# Altium PCB zb_button.PcbDoc
Units mil, origin at the board's own origin, x right, y up, seen from the top; angles counter-clockwise.
Board outline 2500 x 2400 mil, 2 copper layers (Top Layer, Bottom Layer); 39 components, 27 nets, 120 pads, 2 vias.
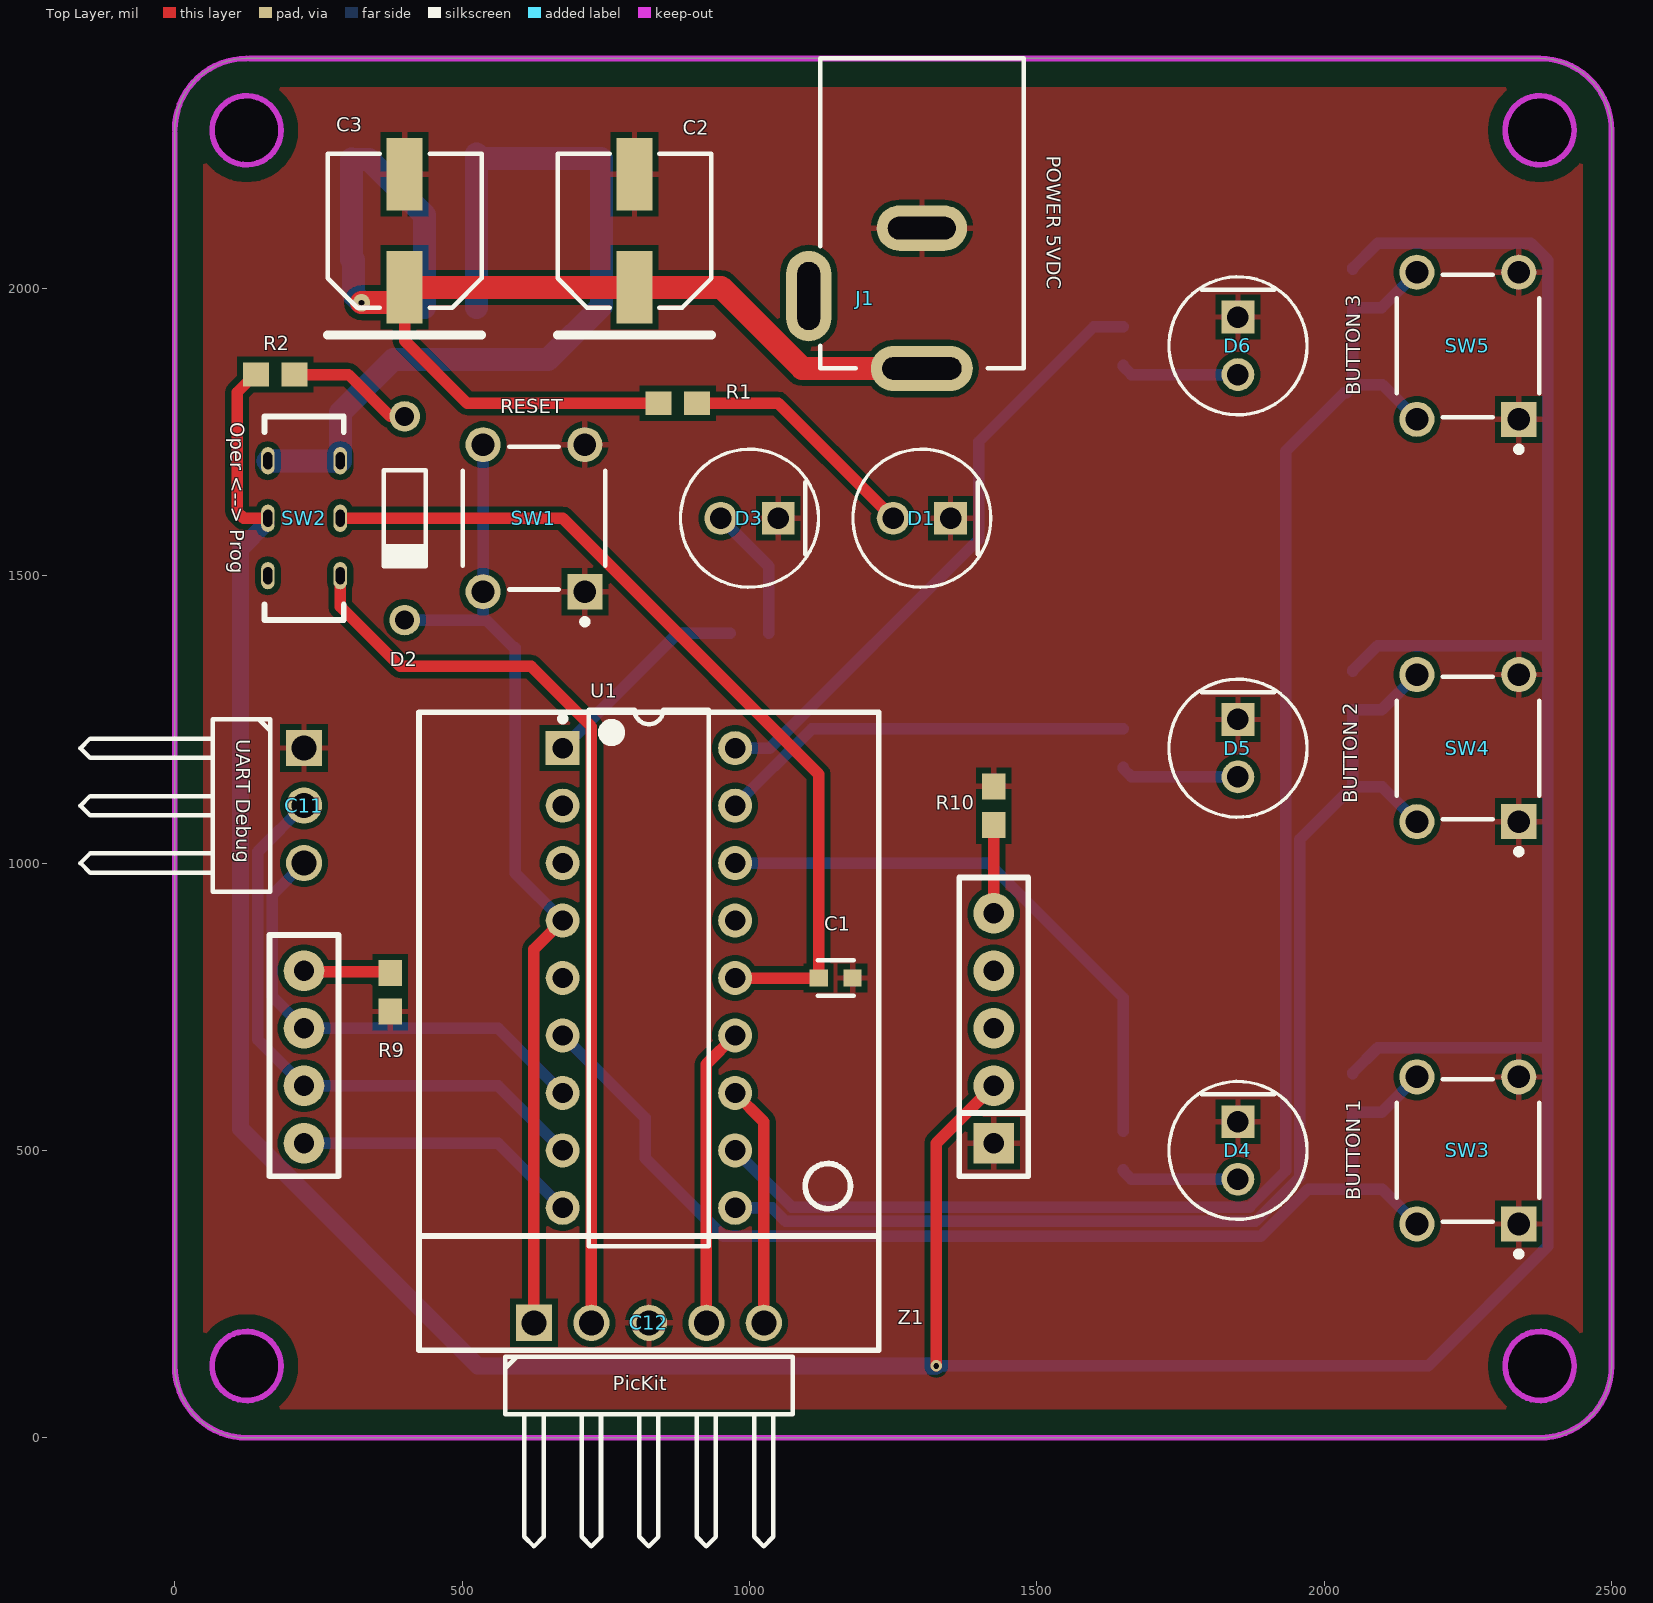
[diagram p0: Top Layer view]
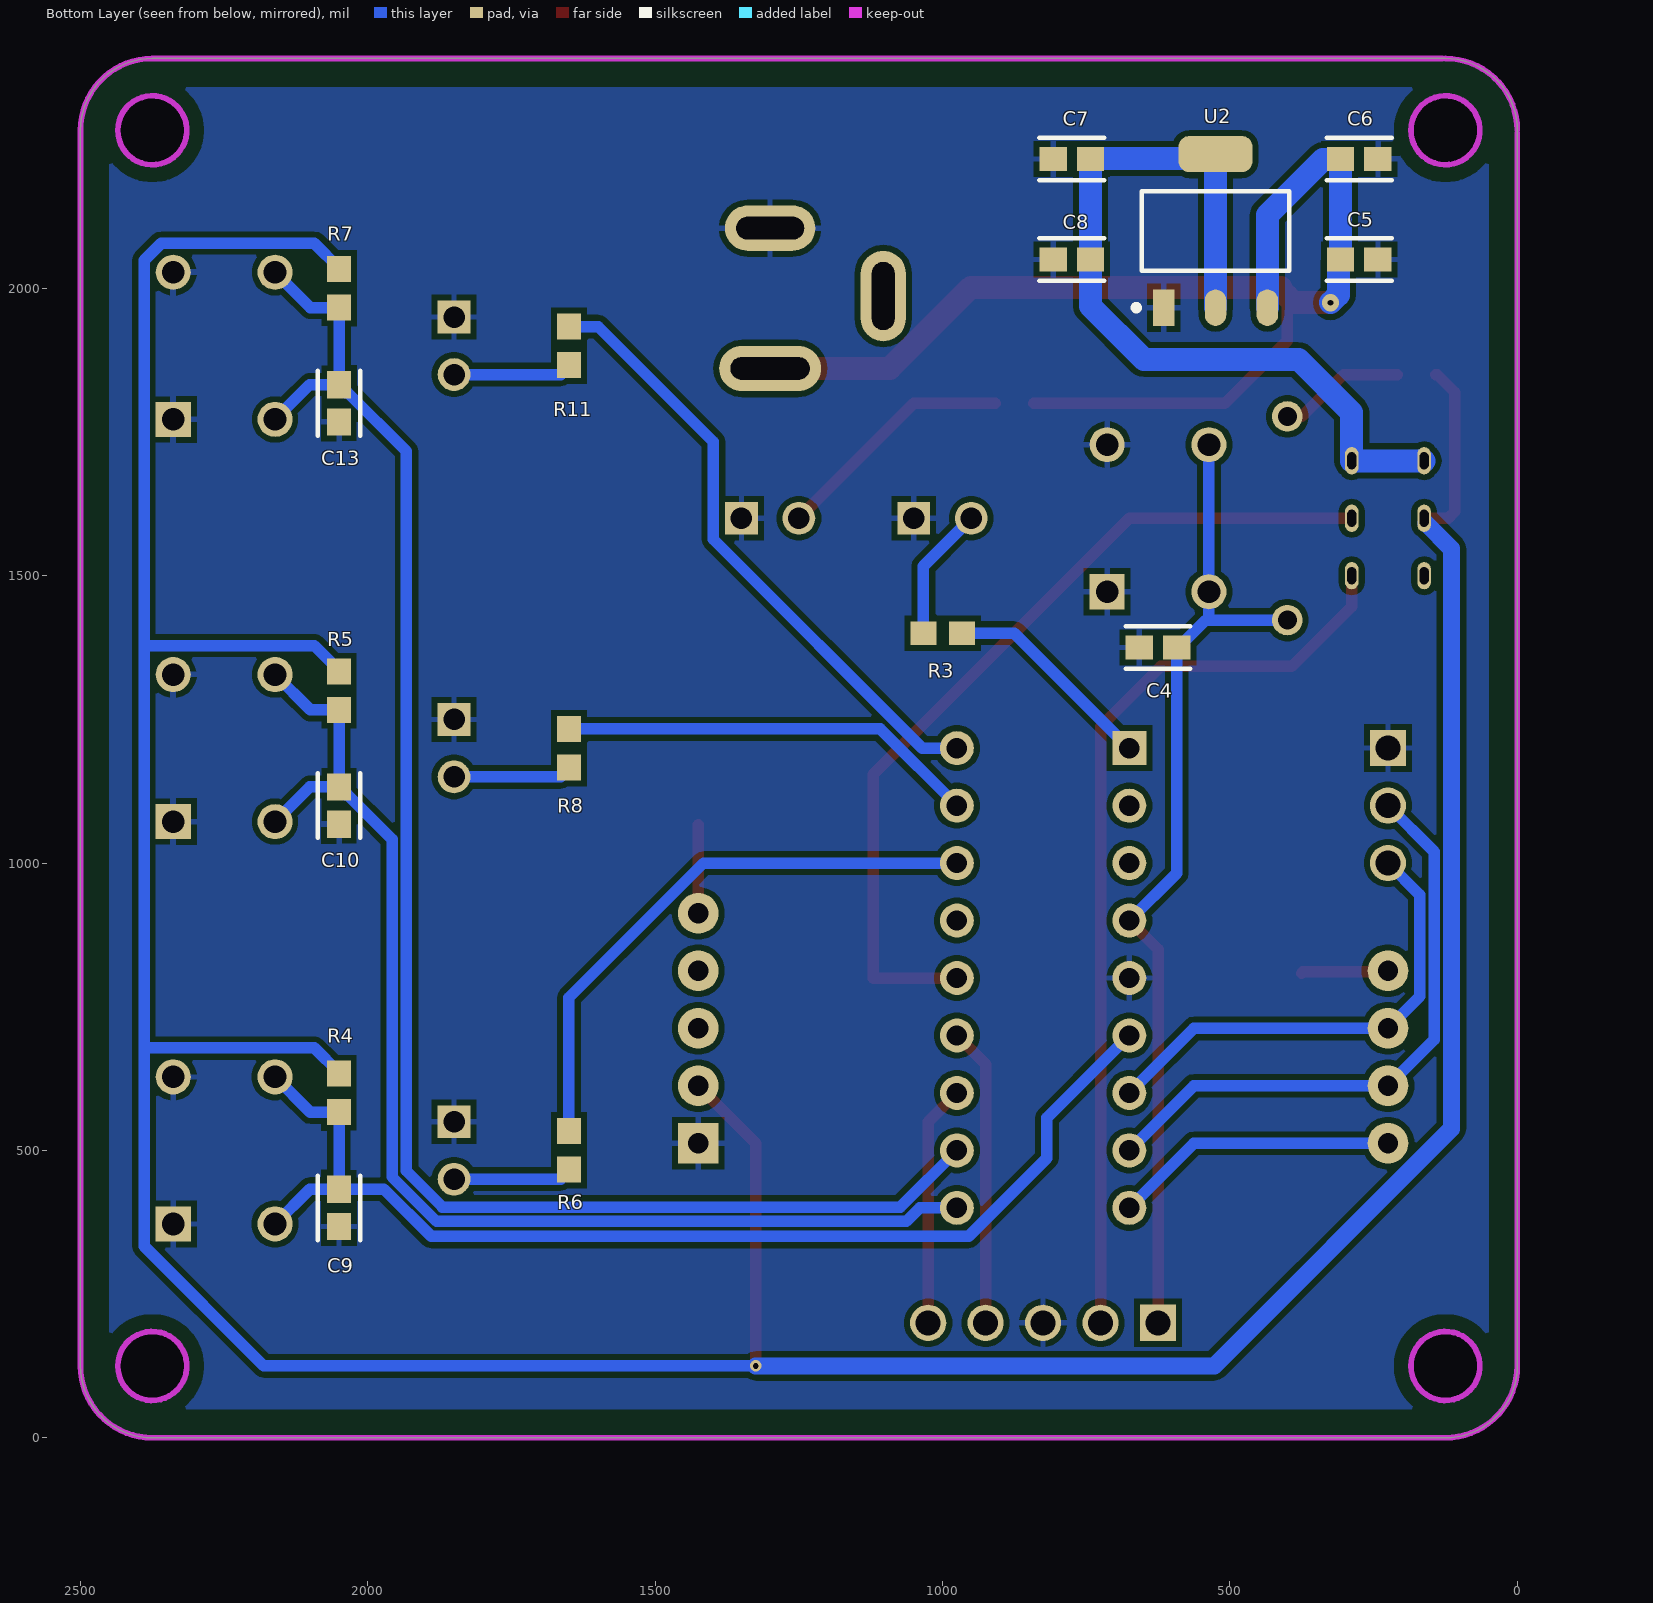
[diagram p1: Bottom Layer view, seen from below]
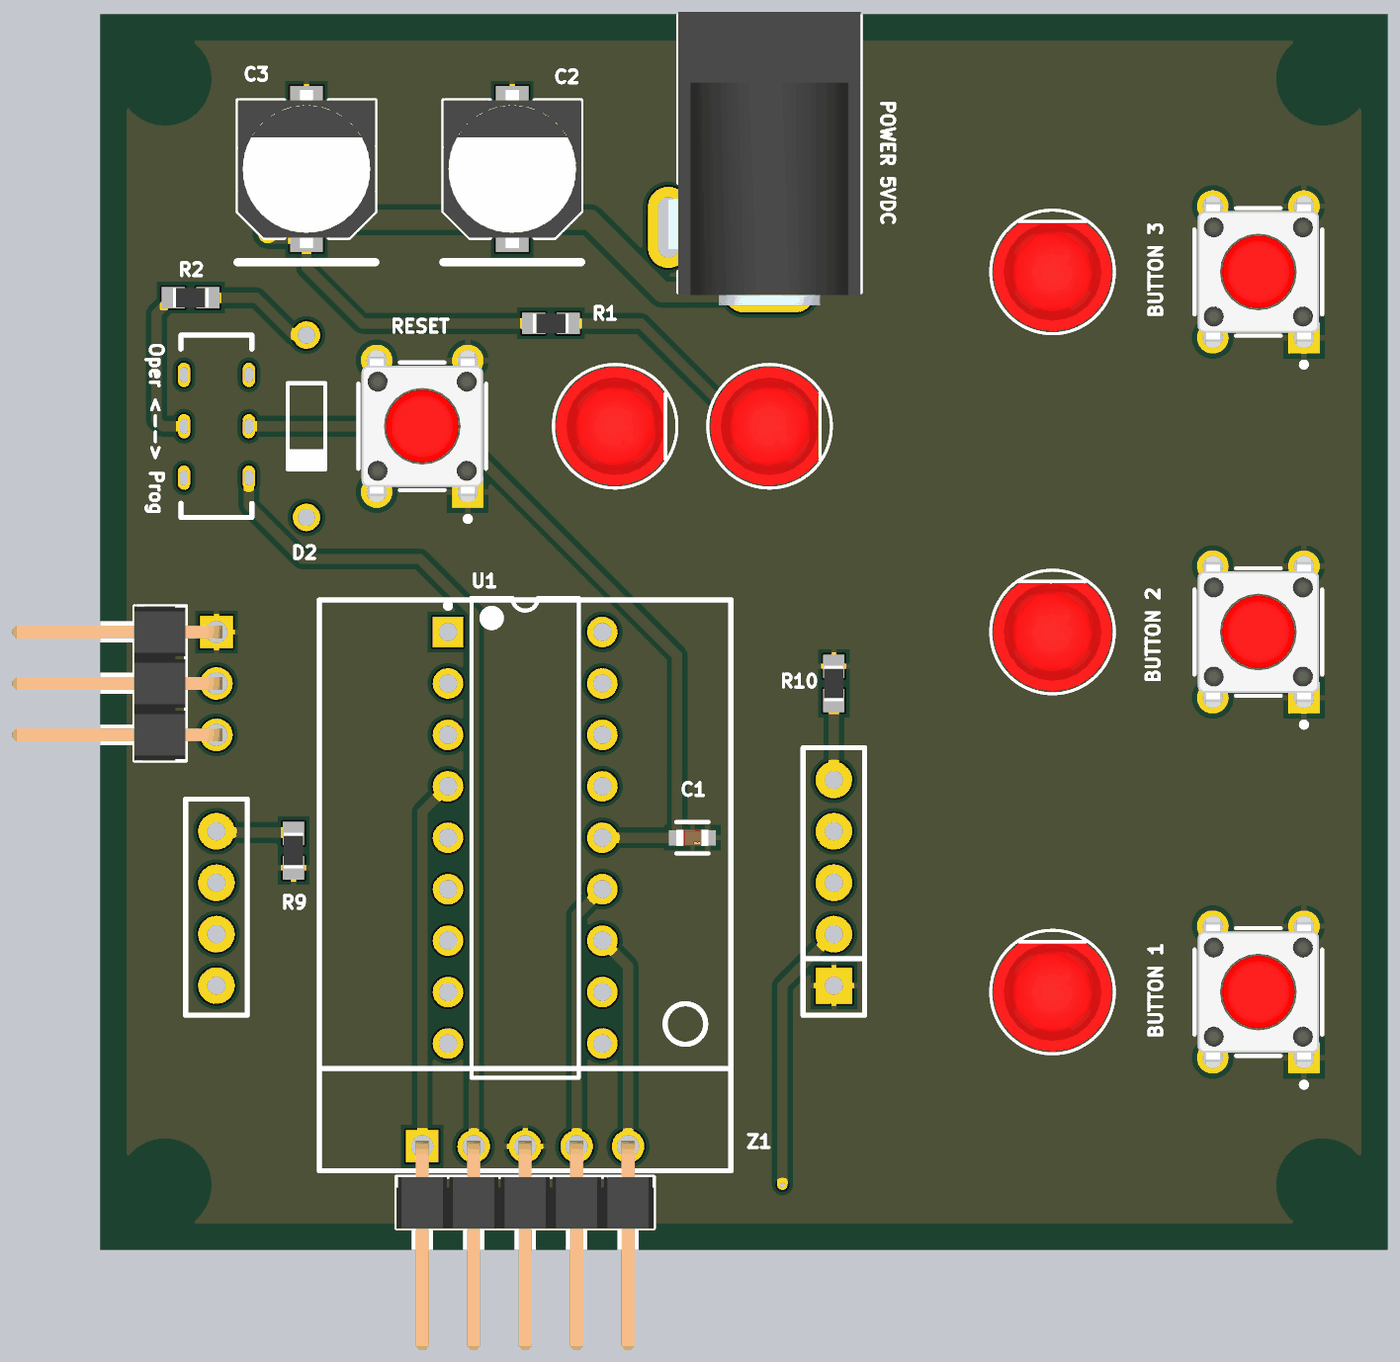
[diagram p2: 3D render of the assembled board from above, using the file's embedded part models]
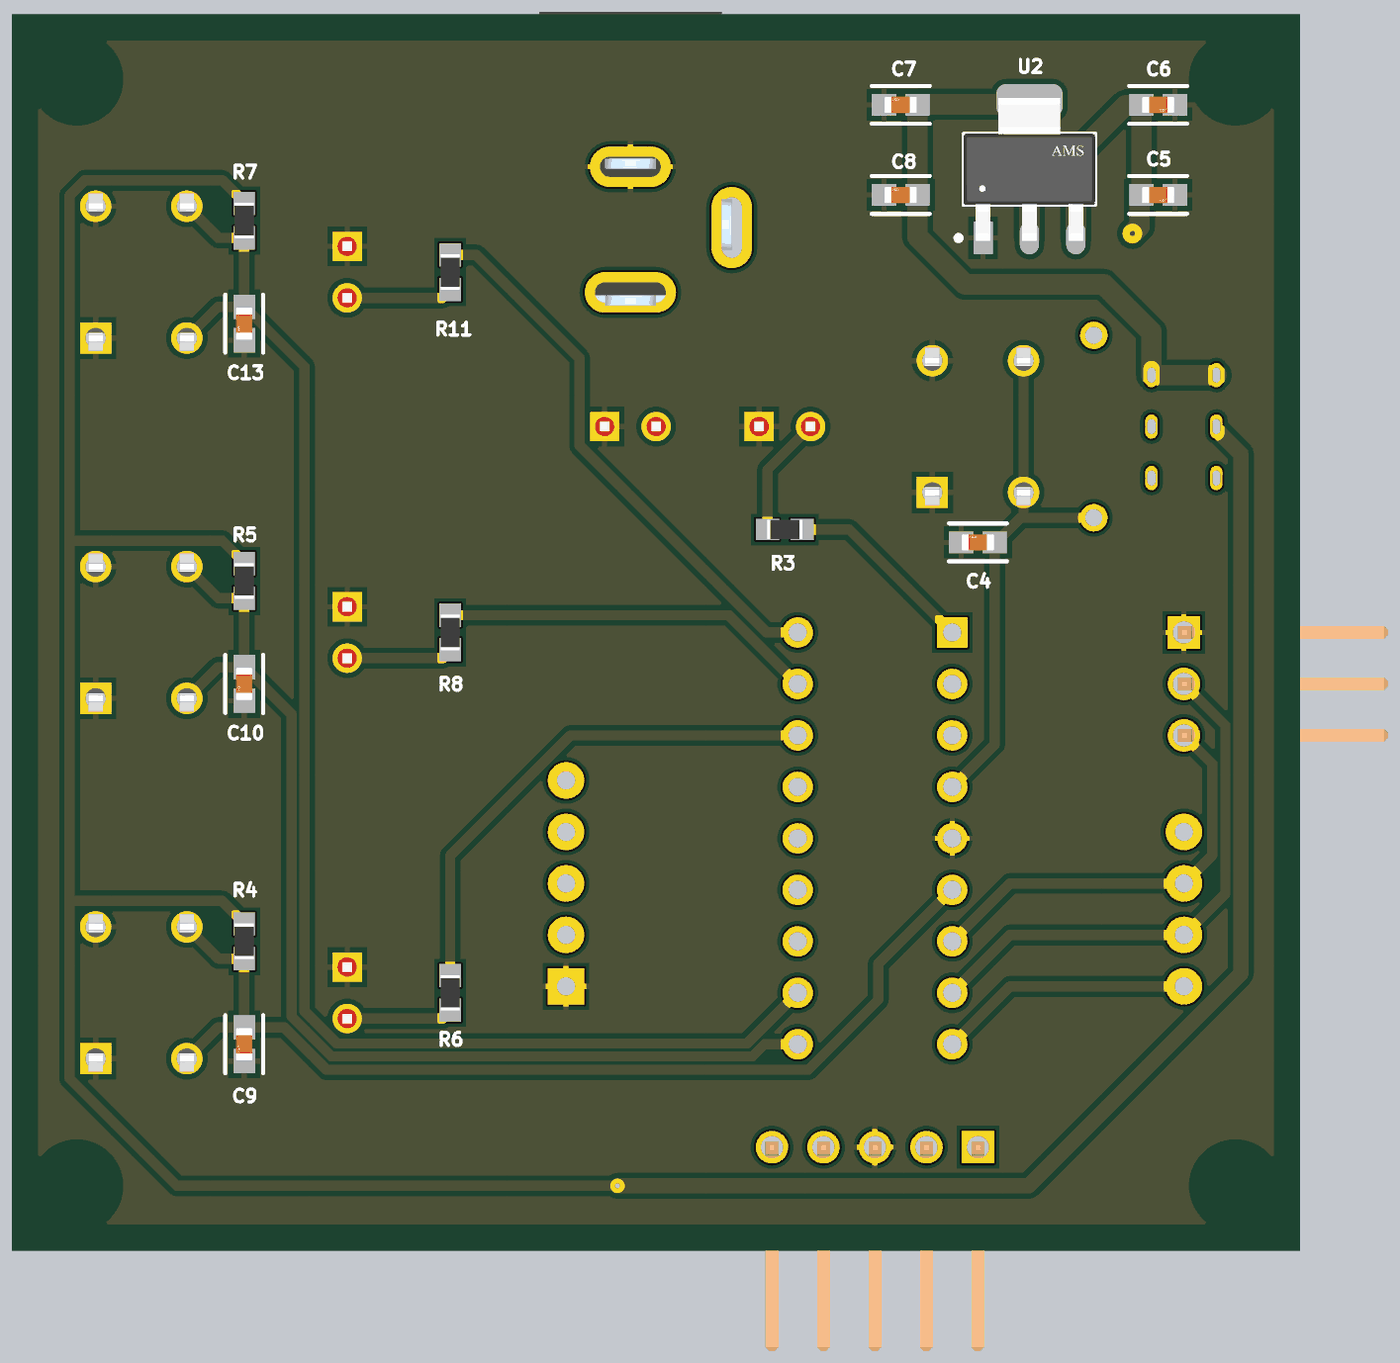
[diagram p3: 3D render of the assembled board from below, using the file's embedded part models]

## Layer stack, top to bottom
Top Solder: solder mask 0.4, Solder Resist, Dk 3.5
Top Layer: signal copper 1.4
Dielectric 1: dielectric 12.6, FR-4, Dk 4.8
Bottom Layer: signal copper 1.4
Bottom Solder: solder mask 0.4, Solder Resist, Dk 3.5

## Board outline
125,0 cw(c125,125) 0,125 0,2275 cw(c125,2275) 125,2400 2375,2400 cw(c2375,2275) 2500,2275 2500,1175 2500,125 cw(c2375,125) 2375,0
cut-out: 125,65 cw(c125,125) 65,125 cw(c125,125) 125,185 cw(c125,125) 185,125 cw(c125,125)
cut-out: 2315,2275 ccw(c2375,2275) 2375,2215 ccw(c2375,2275) 2435,2275 ccw(c2375,2275) 2375,2335 ccw(c2375,2275)
cut-out: 2315,125 ccw(c2375,125) 2375,65 ccw(c2375,125) 2435,125 ccw(c2375,125) 2375,185 ccw(c2375,125)
cut-out: 125,2215 cw(c125,2275) 65,2275 cw(c125,2275) 125,2335 cw(c125,2275) 185,2275 cw(c125,2275)

## Design rules (kind name [scope] priority, off if disabled: settings)
Clearance [All] p1: gap=5 ignorepadtopadclearanceinfootprint=TRUE except(10: Track-THPad Track-Poly SMDPad-Poly THPad-Poly Via-Poly; 30: Poly-Region)
ComponentClearance [All] p1: gap=0 collisioncheckmode=3 verticalgap=0 showdistances=FALSE
HoleSize [All] p1: absolutevalues=TRUE maxlimit=150 minlimit=1 maxpercent=80.000 minpercent=20.000
MinimumSolderMaskSliver [All] p1: minsoldermaskwidth=1
PolygonConnect [All] p1: connectstyle=Relief reliefconductorwidth=10 reliefentries=4 polygonreliefangle="90 Angle" airgapwidth=10
RoutingVias [All] p1: holewidth=10 width=20 viastyle="Through Hole" minholewidth=5 minwidth=10 maxholewidth=20 maxwidth=50
SilkToSilkClearance [All] p1: silktosilkclearance=5
SilkToSolderMaskClearance [IsPad] p1: minsilkscreentomaskgap=1 clearancetoexposedcopper=TRUE
SolderMaskExpansion [All] p1: expansion=4 istentingtop=FALSE
Width [All] p1: maxlimit=100 minlimit=10 preferedwidth=20
25 further rules are at their usual default settings.

## Components (designator, comment, footprint, x,y, rotation, side; value= is the part's Value field where it differs from the comment)
C1 "0.1uF" FP-0603-L_1_6_0_15-W_0_81-MFG 1150,800 r0 top
C2 "100uF" PNSC-FK-V-D8_V 800,2100 r90 top
C3 "100uF" PNSC-FK-V-D8_V 400,2100 r90 top
C4 "10μF" FP-0603-L_1_6_0_15-W_0_81-IPC_A 625,1375 r0 bottom
C5 "100nF" FP-0603-L_1_6_0_15-W_0_81-IPC_A 275,2050 r180 bottom
C6 "10μF" FP-0603-L_1_6_0_15-W_0_81-IPC_A 275,2225 r180 bottom
C7 "10μF" FP-0603-L_1_6_0_15-W_0_81-IPC_A 775,2225 r0 bottom
C8 "100nF" FP-0603-L_1_6_0_15-W_0_81-IPC_A 775,2050 r0 bottom
C9 "10μF" FP-0603-L_1_6_0_15-W_0_81-IPC_A 2050,400 r270 bottom
C10 "10μF" FP-0603-L_1_6_0_15-W_0_81-IPC_A 2050,1100 r270 bottom
C11 "UART Debug" JP3-D1C 125,950 r270 top
C12 "PicKit" JP5-D1C 1075,100 r0 top
C13 "10μF" FP-0603-L_1_6_0_15-W_0_81-IPC_A 2050,1800 r270 bottom
D1 "Power" FP-HLMP-4700-MFG 1300,1600 r180 top
D2 "1N4148" NXP-SOD27-2_V 400,1600 r270 top
D3 "Indicator" FP-HLMP-4700-MFG 1000,1600 r180 top
D4 "LED 1" FP-HLMP-4700-MFG 1850,500 r270 top
D5 "LED 2" FP-HLMP-4700-MFG 1850,1200 r270 top
D6 "LED 3" FP-HLMP-4700-MFG 1850,1900 r270 top
J1 "POWER 5VDC" KYCN-KLDX-0202-B_V 1300,2400 r270 top
R1 "1K" RESC1609X55X30ML15T15 875,1800 r180 top
R2 "10K" RESC1609X55X30ML15T15 175,1850 r180 top
R3 "510" RESC1609X55X30ML15T15 1000,1400 r180 bottom
R4 "10K" RESC1609X55X30ML15T15 2050,600 r90 bottom
R5 "10K" RESC1609X55X30ML15T15 2050,1300 r90 bottom
R6 "1K" RESC1609X55X30ML15T15 1650,500 r270 bottom
R7 "10K" RESC1609X55X30ML15T15 2050,2000 r90 bottom
R8 "1K" RESC1609X55X30ML15T15 1650,1200 r270 bottom
R9 "10K" RESC1609X55X30ML15T15 375,775 r90 top
R10 "10K" RESC1609X55X30ML15T15 1425,1100 r270 top
R11 "1K" RESC1609X55X30ML15T15 1650,1900 r270 bottom
SW1 "RESET" FP-EVQ-PAG05R-MFG 625,1600 r180 top
SW2 "MH-G6" MH-G6 225,1600 r270 top
SW3 "BUTTON 1" FP-EVQ-PAG05R-MFG 2250,500 r180 top
SW4 "BUTTON 2" FP-EVQ-PAG05R-MFG 2250,1200 r180 top
SW5 "BUTTON 3" FP-EVQ-PAG05R-MFG 2250,1900 r180 top
U1 "PIC16F628A-I/P" PDIP300-P18 825,800 r0 top
U2 "AMS1117-3.3" FP-AMS1117-IPC_A 525,2100 r90 bottom
Z1 "SZ1V5" "SZ1V5 PINOUT MODULE" 825,825 r180 top

## Footprints (in the part's own frame and the unit in brackets; to place one, negate y for a bottom-side part, rotate by r counter-clockwise, add the part's x,y. Pads: shape width x height; smd on the part's side, far side on the other; paste and mask are expansions set on the pad)
FP-0603-L_1_6_0_15-W_0_81-IPC_A [mil]
  rect 47.5x42.06 smd paste+0 mask+0: 1(-32.51,0) 2(32.51,0)
  silkscreen extent -56,-37 56,37, body extent -31,-16 31,16, height 35
FP-0603-L_1_6_0_15-W_0_81-MFG [mm]
  rect 0.8x0.75 smd paste+0 mask+0: 1(-0.75,0) 2(0.75,0)
  silkscreen extent -0.8,-0.77 0.8,0.77, body extent -1.25,-0.58 1.25,0.58, height 0.25
FP-AMS1117-IPC_A [mm]
  rect 1.604x0.952 smd paste+0 mask+0: 1(-3.395,2.29)
  rrect100% 1.604x0.952 smd paste+0 mask+0: 2(-3.395,0) 3(-3.395,-2.29)
  rrect59% 1.604x3.262 smd paste+0 mask+0: 4(3.395,0)
  silkscreen extent -3.52,-3.25 1.75,3.63, body extent -3.53,-3.25 3.53,3.25, height 1.8
FP-EVQ-PAG05R-MFG [mm]
  rect 1.55x1.55 hole 1 paste-1000 mask+0: A(-2.25,3.25)
  round 1.55 hole 1 paste-1000 mask+0: A'(-2.25,-3.25) B(2.25,3.25) B'(2.25,-3.25)
  silkscreen extent -3.15,-3.15 3.15,4.7, body extent -3.25,-4.13 3.25,4.13, height 0.25
FP-HLMP-4700-MFG [mm]
  rect 1.45x1.45 hole 0.95 paste-1000 mask+0: 1(-1.27,0)
  round 1.45 hole 0.95 paste-1000 mask+0: 2(1.27,0)
  silkscreen extent -3.05,-3.05 3.05,3.05, body extent -3.15,-3.15 3.15,3.15, height 0.25
JP3-D1C [mm] "3 pins, 1 row, right angled, gold plating"
  rect 1.6x1.6 hole 1.1: 1(-6.35,2.54)
  round 1.6 hole 1.1: 2(-3.81,2.54) 3(-1.27,2.54)
  silkscreen extent -7.62,-7.34 0,1.04, body extent -7.62,-7.52 0,2.84, height 2.55
JP5-D1C [mm] "5 pins, 1 row, right angled, gold plating"
  rect 1.6x1.6 hole 1.1: 1(-11.43,2.54)
  round 1.6 hole 1.1: 2(-8.89,2.54) 3(-6.35,2.54) 4(-3.81,2.54) 5(-1.27,2.54)
  silkscreen extent -12.7,-7.34 0,1.04, body extent -12.7,-7.52 0,2.84, height 2.55
KYCN-KLDX-0202-B_V [mm] "3 Conductor Jack, 9 x 14.5 mm Body"
  oval 2x4.5 hole 1 slot 3.5 at 90 deg: 1(13.7,0)
  oval 2x4 hole 1 slot 3 at 90 deg: 2(7.5,0)
  oval 4x2 hole 1 slot 3 at 0 deg: 3(10.5,-5)
  silkscreen extent 0,-4.5 13.7,4.5, body extent -0.15,-5 14.35,4.5, height 11
MH-G6 [mm]
  rrect100% 1.2x0.6 hole 0.4 slot 0.75 at 0 deg: 1(-2.54,-1.6) 2(0,-1.6) 3(2.54,-1.6) 4(-2.54,1.6) 5(0,1.6) 6(2.54,1.6)
  silkscreen extent -4.5,-1.75 4.5,1.75
NXP-SOD27-2_V [mm] "SOD27, 2-Leads, Dia 1.85mm, Body Length 4.25mm, Pin Spacing 9mm"
  round 1.35 hole 0.85: 1(-4.5,0) 2(4.5,0)
  silkscreen extent -2.12,-0.93 2.12,0.92, body extent -4.78,-0.92 4.78,0.92, height 1.84
PDIP300-P18 [mm] "DIP, 18-Pin, Row Spacing 7.62 mm, Pitch 2.54 mm"
  rect 1.5x1.5 hole 0.9: 1(-3.81,10.16)
  round 1.5 hole 0.9: 2(-3.81,7.62) 3(-3.81,5.08) 4(-3.81,2.54) 5(-3.81,0) 6(-3.81,-2.54) 7(-3.81,-5.08) 8(-3.81,-7.62) 9(-3.81,-10.16) 10(3.81,-10.16) 11(3.81,-7.62) 12(3.81,-5.08) 13(3.81,-2.54) 14(3.81,0) 15(3.81,2.54) 16(3.81,5.08) 17(3.81,7.62) 18(3.81,10.16)
  silkscreen extent -3.93,-11.85 2.65,11.85, body extent -3.6,-11.8 3.6,11.8, height 5.33
PNSC-FK-V-D8_V [mm] "CAPAE, 2-Leads, Body 6.80x6.80mm"
  rect 3.2x1.6 smd: 1(-2.5,0) 2(2.5,0)
  silkscreen extent -4.6,-3.4 3.4,3.4, body extent -3.9,-3.4 3.9,3.4, height 8
RESC1609X55X30ML15T15 [mm] "Chip Resistor, 2-Leads, Body 1.75x0.95mm, IPC Low Density"
  rect 1.15x1.05 smd: 1(-0.85,0) 2(0.85,0)
  body extent -0.87,-0.48 0.87,0.48, height 0.55
"SZ1V5 PINOUT MODULE" [mm]
  rect 1.8x1.8 hole 0.9: 1(-15.24,7.937)
  round 1.8 hole 0.9: 3(-15.24,5.397) 5(-15.24,2.857) 6(-15.24,0.317) 7(-15.24,-2.223) 13(15.24,7.938) 16(15.24,5.398) 17(15.24,2.858) 24(15.24,0.318)
  silkscreen extent -16.76,-11.11 16.76,17.08

## Part data
C1 C4 C6 C7 C9 C10 C13: library part CMP-1035-02592-4, "General Purpose Ceramic Capacitor, 0603, 100nF, 10%, X7R, 15%, 50V", Capacitance=100nF, Case Code (Imperial)=0603, Case Code (Metric)=1608, Dielectric=X7R, Dielectric Material=Ceramic, Max Operating Temperature=125°C, Min Operating Temperature=-55°C, Package Quantity=1, Tolerance=10%, Voltage=50V, Case/Package=0603, Contact Plating=Tin, Depth=0.81mm, Dissipation Factor=2.5%, Height=0.9mm, Lead Free="Lead Free", Length=1.6mm, Mount="Surface Mount", Number of Pins=2, Packaging="Tape and Reel", Radiation Hardening=No, REACH SVHC="No SVHC", Termination=SMD/SMT, Thickness=0.035inch, Voltage Rating=50V, Voltage Rating (DC)=50V, Width=0.81mm
C2 C3: library part CMP-2000-06206-1, "Aluminum Electrolytic Capacitor, 100 uF, +/- 20%, 25 V, 2-Pin SMD (Size Code D8), -55 to 105 degC, RoHS, Tape and Reel", Capacitance=100µF, Case Size/Dimension=Ø6.3x7.7mm, Lifetime@Temperature=2000Hrs@105°C, Manufacturer=Panasonic, Operating Temp Range=-55to+105°C, Operating Temp-Max=105°C, Package Description="2-Pin Electrolytic Aluminum Capacitor, Body 6.6 x 6.6 mm", Package Reference=FK-V-D8, Rated Voltage=25V, Ripple Current=280mA, Datasheet URL=http://industrial.panasonic.com/cdbs/www-data/pdf/RDE0000/ABA0000C1181.pdf, Datasheet Version=03/2016, Impedance=0.34O, Manufacturer URL=http://www.panasonic.com/, Mounting Technology=SurfaceMount, Package URL=http://industrial.panasonic.com/cdbs/www-data/pdf/RDE0000/DME0000COL48.pdf, Series=FK, Type=Can
C5 C8: library part CMP-1035-02592-4, "General Purpose Ceramic Capacitor, 0603, 100nF, 10%, X7R, 15%, 50V", Case Code (Imperial)=0603, Case Code (Metric)=1608, Dielectric=X7R, Dielectric Material=Ceramic, Max Operating Temperature=125°C, Min Operating Temperature=-55°C, Package Quantity=1, Tolerance=10%, Voltage=50V, Capacitance=100nF, Case/Package=0603, Contact Plating=Tin, Depth=0.81mm, Dissipation Factor=2.5%, Height=0.9mm, Lead Free="Lead Free", Length=1.6mm, Mount="Surface Mount", Number of Pins=2, Packaging="Tape and Reel", Radiation Hardening=No, REACH SVHC="No SVHC", Termination=SMD/SMT, Thickness=0.035inch, Voltage Rating=50V, Voltage Rating (DC)=50V, Width=0.81mm
C11: library part JP3, "WR-PHD 2.54 mm Angled Socket Header", Manufacturer="W¨¹rth Elektronik eiSos GmbH", partNo=613003143121, ComponentLink1 Description=Manufacturer, ComponentLink1URL=http://www.we-online.com, ComponentLink2 Description=Datasheet, ComponentLink2URL=http://katalog.we-online.de/em/datasheet/6130xx143121.pdf, Created by="Karrer Zheng", Created Date="29 March 2013", NoPins=03
C12: library part JP5, "WR-PHD 2.54 mm Angled Socket Header", Manufacturer="W¨¹rth Elektronik eiSos GmbH", partNo=613005143121, ComponentLink1 Description=Manufacturer, ComponentLink1URL=http://www.we-online.com, ComponentLink2 Description=Datasheet, ComponentLink2URL=http://katalog.we-online.de/em/datasheet/6130xx143121.pdf, Created by="Karrer Zheng", Created Date="29 March 2013", NoPins=05
D1 D3 D4 D5 D6: library part CMP-18399-000008-1, "LED RED DIFFUSED T-1 3/4 T/H", Colour=Red, Forward Current=2mA, Forward Voltage=1.7V, Manufacturer=Broadcom, Manufacturer Part Number=HLMP-4700, Power Dissipation=14mW, Reverse Voltage=5V, Temperature="-40°C to +100°C", Temperature Range High=+100°C, Temperature Range Low=-40°C, Automotive=No, Category=Diode, ComponentLink2Description=Datasheet, ComponentLink2URL=https://docs.broadcom.com/docs/AV02-1557EN, Device Class L1=Optoelectronics, Device Class L2=LEDs, Device Class L3=unset, Digikey Description="LED RED DIFFUSED T-1 3/4 T/H", Lead Free=Yes, Led Orientation=Straight, Luminous Intensity=2.3mcd, Mouser Description="LED; Red; 2.3mcd; 0.24In.Dia.; T-1-3/4; 500mA; 1.7V; 635nm; 50deg; 5V; 24mW; -55degC;", Octopart=https://octopart.com/hlmp-4700-broadcom-71130526, Package=HLMP-4700, Peak Emmision Wavelength=635nm, RoHS=TRUE, Viewing Angle=50°, Wavelength=626nm
D2: library part CMP-0648-00002-1, "High-speed Diode, 100 V, 450 mA, 2-Pin SOD27, RoHS", Manufacturer="NXP Semiconductors", Cd="4 pF Max.", ComponentLink1Description="Manufacturer URL", ComponentLink1URL=http://www.nxp.com/, ComponentLink2Description=Datasheet, ComponentLink2URL=http://www.nxp.com/documents/data_sheet/1N4148_1N4448.pdf, ComponentLink3Description="Package Specification", ComponentLink3URL=http://www.nxp.com/documents/data_sheet/1N4148_1N4448.pdf, Configuration=Single, DatasheetVersion=Aug-04, IF="200 mA Max.", IFRM="450 mA", IFSM="4 A Max.", IR (VR="20 V)=25 nA", Mounting Technology="Through Hole", PackageDescription="2-Pin Hermetically Sealed Glass Package, Axial Leaded, Dia 1.85 mm, Body Length 4.25 mm, Lead Spread 25.4 mm", PackageReference=SOD27, PackageVersion=Aug-04, PartNumber=1N4148, RoHS=TRUE, Trr="4 ns Max.", VF (IF="10 mA)=1 V", VR="100 V Max."
J1: library part CMP-0256-00001-1, "3 Conductor Power Jack, 2 break 2 aux contacts", PartNumber=KLDX-0202-B, ComponentLink1Description="Manufacturer URL", ComponentLink1URL=http://kycon.com/, ComponentLink2Description=Datasheet, ComponentLink2URL=http://anacapa.kycon.com/Catalog_PDF/KLDX_0202.pdf, Contact Finish=Brass, Mounting Technology="Through Hole", PackageDescription="Jack, 9 x 14.5 mm Body, 2.5 mm Center Pin Diameter", PackageReference=KLDX-0202-B
R1 R2 R3 R4 R5 R6 R7 R8 R9 R10 R11: library part CMP-1012-00623-3, "Chip Resistor, 10 KOhm, +/- 1%, 0.1 W, -55 to 155 degC, 0603 (1608 Metric), RoHS, Tape and Reel", Case Code (Imperial)=0603, Case Code (Metric)=1608, Manufacturer=Panasonic, Max Operating Temperature=155degC, Max Power Dissipation=100mW, Min Operating Temperature=-55degC, Package Description="2-Pin Surface Mount Device, Body 1.6 x 0.85 mm", Package Quantity=1, Package Reference=603, Resistance=10KOhm, Temperature Coefficient=100ppm\/degreesC, Tolerance=1%, Voltage Rating=75V, Case\/Package=0603, Composition=ThickFilm, Contact Plating=Tin, Datasheet URL=https://industrial.panasonic.com/cdbs/www-data/pdf/RDA0000/AOA0000C304.pdf, Datasheet Version=02/2017, Depth=0.8mm, Height=0.45mm, Lead Free=LeadFree, Length=1.6mm, Manufacturer URL=http://www.panasonic.com/, Military Standard=Not, Mount=SurfaceMount, Mounting Technology=SurfaceMount, Number of Pins=2, Number of Terminations=2, Packaging=TapeandReel, Power Rating=100mW, Radiation Hardening=No, REACH SVHC=NoSVHC, RoHSCompliant=true, Termination=SMD/SMT, Voltage Rating (DC)=75V, Width=0.031inch
SW1 SW3 SW4 SW5: library part CMP-05618-000039-1, "SWITCH TACTILE SPST-NO 0.02A 15V", Actuator Color=Red, Contact Current Rating=20mA, Contact Resistance=50mR, Max Operating Temperature=70°C, Max Voltage Rating (DC)=15V, Min Operating Temperature=-20°C, Operating Force=2.6N, Package Quantity=500, Actuator Length=1.6mm, Actuator Type=Standard, Contact Plating=Silver, Current Rating=20mA, Depth=6.5mm, Electrical Life=50000Cycles, Height=5mm, Illumination Type=Non-Illuminated, Lead Free="Lead Free", Length=6mm, Max Current Rating=20mA, Mechanical Life=50000Cycles, Mount="Through Hole", Orientation=Straight, Packaging=Bulk, Radiation Hardening=No, REACH SVHC="No SVHC", RoHS Compliant=Yes, Series=EVQPA, Size=6mm, Switch Function=Off-Mom, Switch Travel=0.25mm, Termination="PC Pin", Throw Configuration=SPST, Voltage Rating (DC)=15V, Width=6mm
SW2: "6-pin switch MH-G6 2.54mm"
U1: library part CMP-0115-00122-1, "FLASH-Based 8-Bit CMOS Microcontroller with nanoWatt Technology, 2K (x14-Bit words) FLASH, 224 Bytes SRAM, 18-Pin PDIP, 3.0 to 5.5V Supply Range, Industrial Temperature", Code_JEDEC=MS-001, DatasheetVersion="revF, Mar-2007", PackageDescription="18-Lead Plastic Dual In-Line (P) - 300 mil Body [PDIP]", PackageReference=PDIP300-P18, PackageVersion="revBB, Aug-2009"
U2: library part CMP-209535-000001-1, "LDO Voltage Regulators 1A, 3.3V", Dropout Voltage=1.1V, Manufacturer="Advanced Monolithic Systems", Max Junction Temp=+125°C, Max Power Dissipation=1.2W, Max Supply Voltage=15V, Nominal Supply Current=5mA, Output Current=1A, Output Voltage=3.3V, Package=AMS1117, Temperature="-40°C to +125°C", Temperature Range Low=-40°C, Automotive=No, Category=IC, ComponentLink2Description=Datasheet, ComponentLink2URL=http://www.advanced-monolithic.com/pdf/ds1117.pdf, Device Class L1="Integrated Circuits (ICs)", Device Class L2="Power Management ICs", Device Class L3="Voltage Regulators - Linear", Height=1.8mm, Ipc Land Pattern Name=SOT229P700X180-4, Lead Free=Yes, Manufacturer Part Number=AMS1117-3.3, Number Of Outputs=1, Octopart=https://octopart.com/ams1117-3.3-advanced+monolithic+systems-25899300, Output Type=Fixed, RoHS=TRUE, Standoff Height=0.64mm, Temperature Range High=+125°C
Z1: library part SZ1V5_Alt

## Via types
v1: diameter 20, hole 10, Top Layer to Bottom Layer, 1 vias
v2: diameter 30, hole 10, Top Layer to Bottom Layer, 1 vias

## Nets (pads, with @x,y where several pads share a name; then routed paths per layer and width w, separated by ;. In a path a pad name is that pad's centre, name@x,y a point inside that pad or via, vN(x,y) a via of type N, cw(c..) or ccw(c..) an arc to the next point about the centre after c; other vN are vias at no path point)
+3: C7.1 C8.1 SW2.1 SW2.4 U2.2 U2.4 | length 1485.3
  Bottom Layer w40: SW2.1 SW2.4 287.99,1783.62 380.67,1876.3 649.81,1876.3 742.49,1968.97 C7.1 741.46,2226.03 532.63,2226.03 U2.4 U2.2
+5: C2.1 C3.1 C5.1 C6.1 J1.1 R1.2 U2.3 | length 2167.2
  Top Layer w20: C3.1@400,1975 400,1908.58 508.58,1800 R1.2
  Top Layer w40: v2(325,1975) 388.5,1975 C3.1@400,1986.5 ; C3.1@411.5,2001.57 950.71,2001.57 1091.66,1860.63 J1.1
  Bottom Layer w40: v2(325,1975) 311.26,1988.74 311.26,2048.97 310.24,2050 C5.1 C6.1 308.54,2223.97 338.22,2223.97 434.84,2127.35 U2.3
BUTTON1: C9.1 R4.1 SW3.B SW3.B' U1.6 | length 2002.1
  Bottom Layer w20: U1.6 818.48,556.52 818.48,486.48 954.49,350.47 1889.83,350.47 1971.88,432.51 C9.1 ; SW3.B 2100.95,432.51 C9.1 ; SW3.B' 2100,566.54 R4.1 C9.1
BUTTON2: C10.1 R5.1 SW4.B SW4.B' U1.10 | length 2151
  Bottom Layer w20: U1.10 1039.64,400 1063.19,376.46 1880.46,376.46 1957.87,453.87 1957.87,1041.35 2035.29,1118.76 2038.97,1118.76 2050,1129.79 C10.1 ; SW4.B 2100.95,1132.51 C10.1 ; SW4.B' 2100,1266.54 R5.1 C10.1
BUTTON3: C13.1 R7.1 SW5.B SW5.B' U1.11 | length 2851
  Bottom Layer w20: U1.11 1073.54,401.46 1870.11,401.46 1932.87,464.22 1932.87,1716.35 2035.29,1818.76 2038.97,1818.76 2050,1829.79 C13.1 ; SW5.B 2100.95,1832.51 C13.1 ; SW5.B' 2100,1966.54 R7.1 C13.1
CFG0: R9.2 Z1.24 | length 151.7
  Top Layer w20: Z1.24 227.02,810.48 372.98,810.48 R9.2
CFG1: R10.2 Z1.7 | length 154
  Top Layer w20: Z1.7 R10.2
GND: C1.2 C2.2 C3.2 C4.2 C5.2 C6.2 C7.2 C8.2 C9.2 C10.2 C11.1 C12.3 C13.2 D1.1 D3.1 D4.1 D5.1 D6.1 J1.2 R9.1 R10.1 SW1.A SW1.A' SW3.A SW3.A' SW4.A SW4.A' SW5.A SW5.A' U1.5 U2.1 Z1.1
LED1: R6.1 U1.16 | length 1004.4
  Bottom Layer w20: U1.16 1415.89,1000 1650,765.89 R6.1
LED2: R8.1 U1.17 | length 730.3
  Bottom Layer w20: U1.17 1108.46,1233.46 R8.1
LED3: R11.1 U1.18 | length 1078.1
  Bottom Layer w20: U1.18 1035.37,1200 1398.54,1563.17 1398.54,1732.68 1599.33,1933.46 R11.1
LED_IND: R3.2 U1.1 | length 374.4
  Bottom Layer w20: U1.1 875,1400 R3.2
MCLR/VPP: C4.1 C12.1 D2.2 SW1.B SW1.B' U1.4 | length 1747.3
  Top Layer w20: C12.1 625,850 U1.4
  Bottom Layer w20: D2.2 541.93,1422.83 589.76,1375 C4.1 592.49,982.51 U1.4 ; 536.42,1422.83 SW1.B'
NetD1_2: D1.2 R1.1 | length 424.4
  Top Layer w20: R1.1 1050,1800 D1.2
NetD2_1: D2.1 R2.1 | length 196.7
  Top Layer w20: R2.1 302.17,1850 D2.1@375,1777.17
NetD3_2: D3.2 R3.1 | length 234.6
  Bottom Layer w20: D3.2 1033.46,1516.54 R3.1
NetD4_2: D4.2 R6.2 | length 208
  Bottom Layer w20: R6.2 1650,464.57 1664.57,450 D4.2
NetD5_2: D5.2 R8.2 | length 208
  Bottom Layer w20: R8.2 1650,1164.57 1664.57,1150 D5.2
NetD6_2: D6.2 R11.2 | length 208
  Bottom Layer w20: R11.2 1650,1864.57 1664.57,1850 D6.2
PGC: C12.5 U1.12 | length 420.7
  Top Layer w20: U1.12 1025,550 C12.5
PGD: C12.4 U1.13 | length 520.7
  Top Layer w20: C12.4 925,650 U1.13
PK_VDD: C12.2 SW2.6 | length 1614.6
  Top Layer w20: SW2.6 287.99,1446.38 392.28,1342.09 620.24,1342.09 725,1237.34 C12.2
VCC: R2.2 R4.2 R5.2 R7.2 SW2.2 Z1.3 | length 7248.9
  Top Layer w20: R2.2 139.57,1850 108.48,1818.91 108.48,1611.72 120.2,1600 SW2.2 ; v1(1325,125) 1325,512.5 Z1.3
  Bottom Layer w20: v1(1325,125) 2180.84,125 2389.09,333.25 2389.09,678.46 ; R4.2 2050,635.43 2093.03,678.46 2389.09,678.46 ; R5.2 2050,1335.43 2093.03,1378.46 2389.09,1378.46 ; R7.2 2050,2035.43 2093.03,2078.46 2359.51,2078.46 2389.09,2048.88 2389.09,1378.46 ; 2389.09,678.46 2389.09,1378.46
  Bottom Layer w30: SW2.2@158.82,1591.38 114.57,1547.13 114.57,537.47 527.03,125 v1(1325,125)
VDD: C1.1 SW2.5 U1.14 | length 1517
  Top Layer w20: SW2.5 674.94,1600 1120.47,1154.47 C1.1 U1.14
Z_RST: U1.9 Z1.13 | length 496.6
  Bottom Layer w20: Z1.13 562.5,512.5 U1.9
Z_RX: C11.2 U1.8 Z1.16 | length 1050.7
  Bottom Layer w20: C11.2 144.57,1019.57 144.57,692.93 Z1.16 562.5,612.5 U1.8
Z_TX: C11.3 U1.7 Z1.17 | length 830
  Bottom Layer w20: C11.3 169.57,944.57 169.57,767.93 Z1.17 562.5,712.5 U1.7
pads on no net: J1.3 SW2.3 U1.2 U1.3 U1.15 Z1.5 Z1.6

## Polygon pours and split planes (outlines as drawn)
GND on Bottom Layer "GND_L02_P000" (solid, pour order 0): 50,2350 2450,2350 2450,50 50,50
GND on Top Layer "GND_L01_P001" (solid, pour order 1): 50,2350 2450,2350 2450,50 50,50

## Keep-outs
Keep-Out Layer:
  circle w10: c125,125 r60
  circle w10: c2375,125 r60
  circle w10: c2375,2275 r60
  circle w10: c125,2275 r60
  lines w10: 0,2270 0,125 ccw(c125,125) 125,0 2375,0 ccw(c2375,125) 2500,125 2500,1175 2500,2275 ccw(c2375,2275) 2375,2400 130,2400 ; 0,2275 cw(c125,2275) 125,2400

## Silkscreen, mask and mechanical layers (free items; w line width, h text height)
Top Overlay:
  text "Oper <--> Prog" at 96.33,1767 h25 r270